# EAGLE board ir_remote_eagle7 (EAGLE 7.7.0)
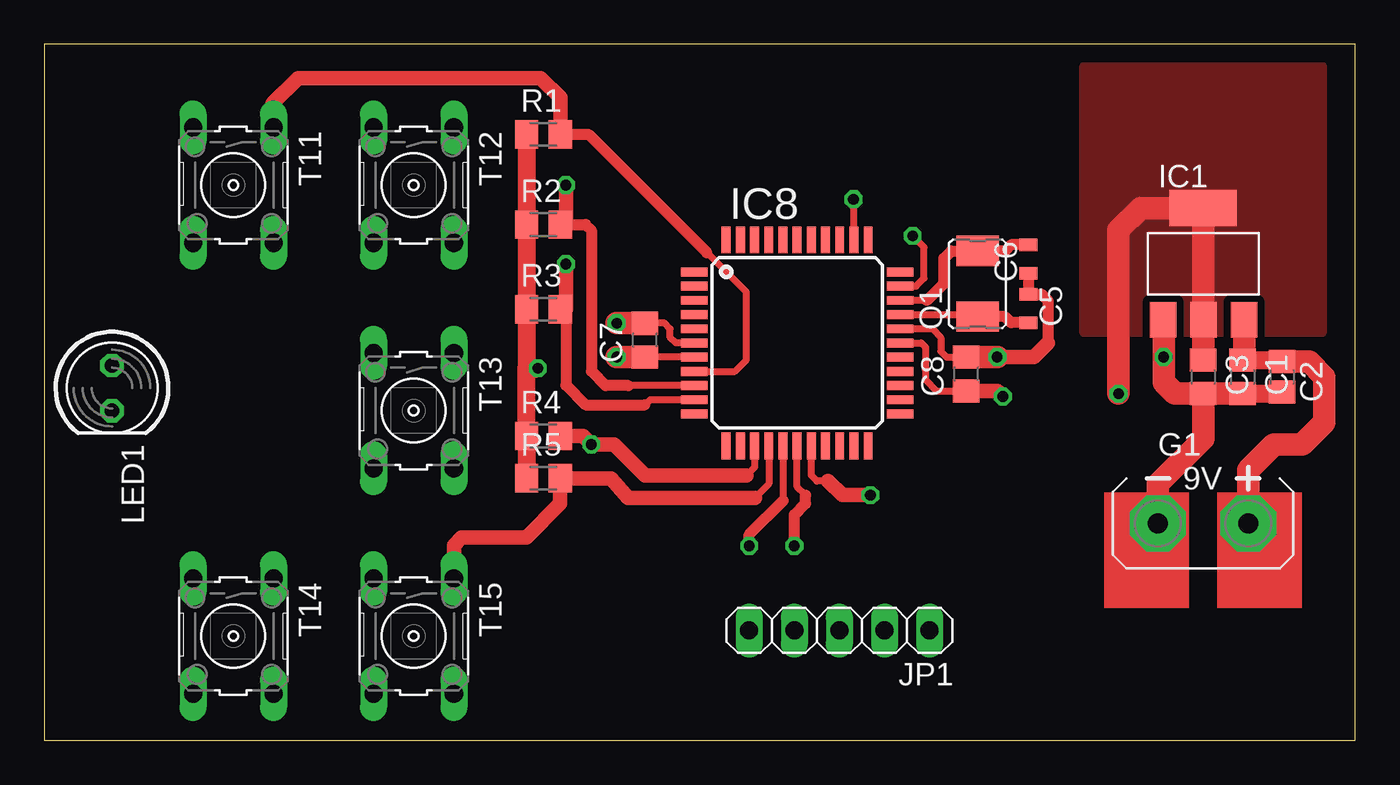
[diagram p0: board, top side]
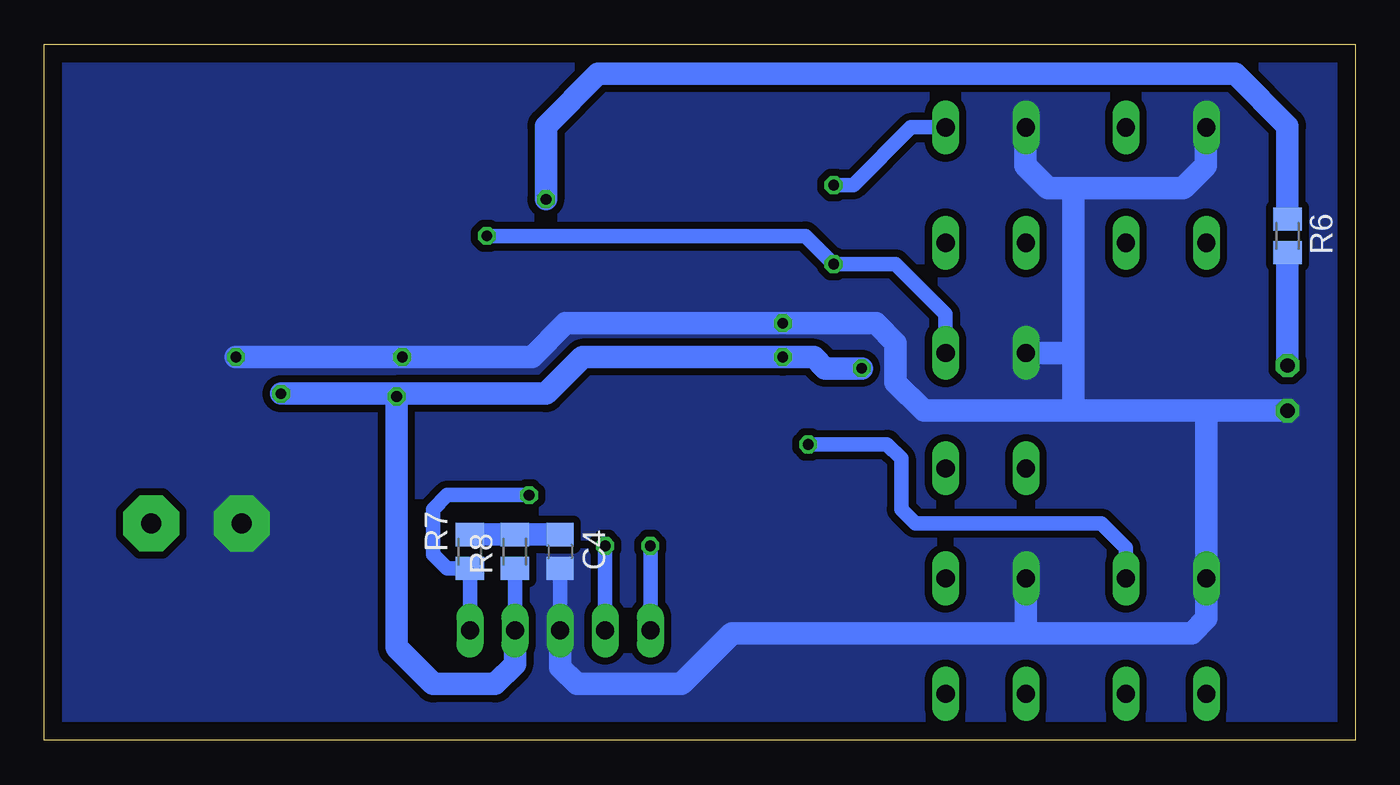
[diagram p1: board, bottom side, seen from below]

Size 73.81 x 39.2 mm. Coordinates in mm from the lower left corner, seen from the top.
Outline: 0,0 73.81,0 73.81,39.2 0,39.2 0,0
Copper layers (1*16): Top 0.035mm / dielectric 1.5mm / Bottom 0.035mm
Design rules "default": minimum track width 6mil, minimum drill 0.35mm, track to track 6mil, track to pad 6mil, pad to pad 6mil, via to via 6mil, smd to smd 6mil, copper to edge 40mil, drill to drill 6mil, minimum pad ring 10mil, minimum via ring 8mil, stop-mask expansion 4mil, vias tented up to drill 0mil, thermal gap 10mil

## Footprints (pad centres in the part's own frame; a part is rotated, then mirrored left to right if it is on the bottom)
C0805 = smd 1.3 x 1.5: 1 -0.95,0; 2 0.95,0
C0805' = smd 1.3 x 1.5: 1 -0.85,0; 2 0.85,0
C0603_WE = smd 0.7 x 1: 1 -0.8,0; 2 0.8,0
AB9V = drill 1.118 pad 3.15 octagon: + 0,2.54; - 0,-2.54
SOT223 = smd 1.499 x 2.007: 1 -2.261,-3.15; 2 0.025,-3.15; 3 2.311,-3.15 | smd 3.81 x 2.007: 4 0,3.15
TQFP44 = smd 1.5 x 0.5: 1 -5.8,4; 2 -5.8,3.2; 3 -5.8,2.4; 4 -5.8,1.6; 5 -5.8,0.8; 6 -5.8,0; 7 -5.8,-0.8; 8 -5.8,-1.6; 9 -5.8,-2.4; 10 -5.8,-3.2; 11 -5.8,-4; 23 5.8,-4; 24 5.8,-3.2; 25 5.8,-2.4; 26 5.8,-1.6; 27 5.8,-0.8; 28 5.8,0; 29 5.8,0.8; 30 5.8,1.6; 31 5.8,2.4; 32 5.8,3.2; 33 5.8,4 | smd 0.5 x 1.5: 12 -4,-5.8; 13 -3.2,-5.8; 14 -2.4,-5.8; 15 -1.6,-5.8; 16 -0.8,-5.8; 17 0,-5.8; 18 0.8,-5.8; 19 1.6,-5.8; 20 2.4,-5.8; 21 3.2,-5.8; 22 4,-5.8; 34 4,5.8; 35 3.2,5.8; 36 2.4,5.8; 37 1.6,5.8; 38 0.8,5.8; 39 0,5.8; 40 -0.8,5.8; 41 -1.6,5.8; 42 -2.4,5.8; 43 -3.2,5.8; 44 -4,5.8
1X05 = drill 1.016 long: 1 -5.08,0; 2 -2.54,0; 3 0,0; 4 2.54,0; 5 5.08,0
LED5MM = drill 0.813 octagon: A -1.27,0; K 1.27,0
QUARZ_HC5032/2 = smd 1.7 x 2.4: 1 -1.85,0; 2 1.85,0
M0805 = smd 1.3 x 1.6: 1 -0.95,0; 2 0.95,0
TASTER3301 = drill 1.016 long: 1 -3.251,2.261; 2 3.251,2.261; 3 -3.251,-2.261; 4 3.251,-2.261

## Placement (x,y rotation side)
C1  10u  [C0805]  67.47,20.48 270 top
C2  100n  [C0805']  69.69,20.48 270 top
C3  10u  [C0805]  65.25,20.48 270 top
C4  100n  [C0805]  44.77,10.64 270 bottom
C5  22p  [C0603_WE]  55.4,24.32 270 top
C6  22p  [C0603_WE]  55.4,27.11 90 top
C7  100n  [C0805]  33.81,22.54 90 top
C8  100n  [C0805]  51.91,20.64 90 top
G1  AB9V  [AB9V]  65.25,12.22 270 top
IC1  AP1117E50G  [SOT223]  65.25,26.83 0 top
IC8  [TQFP44]  42.39,22.38 0 top
JP1  [1X05]  44.77,6.19 180 top
LED1  [LED5MM]  3.81,19.84 270 top
Q1  10MHz  [QUARZ_HC5032/2]  52.55,25.72 90 top
R1  10k  [M0805]  28.1,34.13 0 top
R2  10k  [M0805]  28.1,29.05 0 top
R3  10k  [M0805]  28.1,24.29 0 top
R4  10k  [M0805]  28.1,17.14 0 top
R5  10k  [M0805]  28.1,14.76 0 top
R6  100  [M0805]  3.81,28.42 270 bottom
R7  470  [M0805]  49.85,10.64 90 bottom
R8  10k  [M0805]  47.31,10.64 90 bottom
T11  TASTER3301  [TASTER3301]  10.64,31.27 270 top
T12  TASTER3301  [TASTER3301]  20.8,31.27 270 top
T13  TASTER3301  [TASTER3301]  20.8,18.57 270 top
T14  TASTER3301  [TASTER3301]  10.64,5.87 270 top
T15  TASTER3301  [TASTER3301]  20.8,5.87 270 top

## Library data of the parts
C1 C3-C8 R1-R8 = rcl
C2 = rcl_416
G1 = battery
IC1 = Bernd_110428
IC8 Q1 T11-T15 = Bernd
JP1 = pinhead
LED1 = led

## Nets
+9V: C1.1 C2.1 G1.+ IC1.3
D0_LCD: IC8.27
D1_LCD: IC8.26
GND: C1.2 C2.2 C3.2 C4.2 C5.1 C6.1 C7.2 C8.2 G1.- IC1.1 IC8.6 IC8.29 JP1.3 LED1.K T11.3 T12.3 T13.3 T14.3 T15.3
MCLR: IC8.18 JP1.1 R7.1
N$19: LED1.A R6.2
N$24: C4.1 R7.2 R8.2
N$47: C5.2 IC8.30 Q1.1
N$48: C6.2 IC8.31 Q1.2
RB0: IC8.8 R1.2 T11.1
RB1: IC8.9 R2.2 T12.1
RB2: IC8.10 IC8.32 R3.2 T13.1
RB3: IC8.11
RB4: IC8.14 R4.2 T14.1
RB5: IC8.15 R5.2 T15.1
RB6: IC8.16 JP1.5
RB7: IC8.17 JP1.4
RC1: IC8.35 R6.1
VCC: C3.1 C7.1 C8.1 IC1.2 IC1.4 IC8.7 IC8.28 JP1.2 R1.1 R2.1 R3.1 R4.1 R5.1 R8.1

## Tracks (layer width: path | path; a pad name or v marks a point on that pad's centre or on a via)
+9V
  Top 1.016: C1.1 69.59,21.43 C2.1
  Top 1.27: IC1.3 67.56,21.52 C1.1 | G1.+ 67.79,15.24 69.22,16.67 70.83,16.67 72.07,17.91 72.07,20.48 71.22,21.33 C2.1
GND  (via drill 0.6)
  Top 0.406: IC8.6 35.56,22.38 35.24,22.7 35.24,23.18 34.93,23.49 C7.2 | C8.2 50.8,21.59 50.48,21.91 50.48,22.7 50,23.18 IC8.29
  Top 0.61: C6.1 C5.1 56.16,25.12 56.52,24.77 56.52,22.38
  Top 0.813: 56.52,22.38 55.72,21.59 v53.66,21.59
  Top 1.016: C1.2 69.59,19.53 C2.2
  Top 1.27: G1.- 62.71,14.45 65.25,16.99 C3.2 | IC1.1 63.02,23.64 v63.02,21.59 63.02,20.16 63.66,19.53 C3.2 | C3.2 C1.2 | C8.2 v53.66,21.59 | C7.2 v32.23,23.49 v32.23,23.5
  Bottom 0.813: JP1.3 C4.2
  Bottom 1.27: 15.88,21.81 15.88,18.57 | T13.3 15.89,21.82 15.88,21.81 | 15.88,31.11 9.68,31.11 8.41,32.38 8.41,34.49 T11.3 | 15.88,21.81 15.88,31.11 | 15.88,31.11 17.3,31.11 18.57,32.38 18.57,34.49 T12.3 | JP1.3 44.77,4.13 43.81,3.17 37.94,3.17 35.08,6.03 18.61,6.03 | 18.61,6.03 9.21,6.03 8.38,6.86 T14.3 8.38,18.54 8.41,18.57 | T15.3 18.54,6.1 18.61,6.03 | 15.88,18.57 24.29,18.57 25.88,20.16 25.88,22.38 26.99,23.5 v32.23,23.5 44.45,23.5 46.35,21.59 v53.66,21.59 v63.02,21.59 | LED1.K 8.41,18.57 | 8.41,18.57 15.88,18.57
  pour Bottom (isolate 0.406, no thermals): 0,39.21 0,0 73.82,0 73.82,39.21
MCLR  (via drill 0.6)
  Top 0.406: 44.13,14.61 43.5,14.61 43.18,14.92 IC8.18
  Top 0.813: v46.51,13.81 44.93,13.81 44.13,14.61
  Bottom 0.813: JP1.1 R7.1 51.12,9.69 51.91,10.48 51.91,13.02 51.12,13.81 v46.51,13.81
N$19
  Bottom 1.27: LED1.A R6.2
N$24
  Bottom 1.27: C4.1 R8.2 R7.2
N$47
  Top 0.406: 52.33,23.65 Q1.1 52.43,23.98 IC8.30
  Top 0.61: C5.2 54.43,23.52 54.08,23.87 Q1.1
N$48
  Top 0.406: 49.69,24.78 IC8.31
  Top 0.61: 49.69,24.78 50.64,25.74 50.64,27.15 51.06,27.57 Q1.2 54.08,27.57 54.43,27.91 C6.2
RB0
  Top 0.406: IC8.8 38.88,20.78 39.53,21.43 39.53,25.24 37.31,27.46
  Top 0.61: R1.2 30.64,34.13 37.31,27.46
  Top 0.813: T11.1 12.86,34.56 12.86,35.88 14.29,37.31 27.94,37.31 29.05,36.2 R1.2
RB1  (via drill 0.6)
  Top 0.406: 29.37,29.37 R2.2 | 36.57,20 IC8.9 32.88,19.98 32.86,20
  Top 0.61: R2.2 30.48,29.05 30.8,28.73 30.8,20.8 31.61,19.98 32.88,19.98
  Top 0.813: v29.37,31.27 29.37,29.37
  Bottom 0.813: T12.1 25.01,34.52 28.26,31.27 v29.37,31.27
RB2  (via drill 0.6)
  Top 0.406: 29.37,24.61 R3.2 | IC8.10 34.11,19.18 33.81,18.89 | v48.9,28.42 49.53,27.78 49.53,26.04 49.08,25.58 IC8.32
  Top 0.61: 29.37,24.29 29.37,20 30.48,18.89 33.81,18.89
  Top 0.813: v29.37,26.83 29.37,24.61 29.37,24.29
  Bottom 0.813: T13.1 23.06,24.01 25.88,26.83 v29.37,26.83 30.96,28.42 v48.9,28.42
RB4  (via drill 0.6)
  Top 0.406: 39.53,14.92 40.01,15.4 40.01,16.57 IC8.14
  Top 0.813: 39.53,14.92 33.81,14.92 32.07,16.67 v30.8,16.67 30.32,17.14 R4.2
  Bottom 0.813: v30.8,16.67 26.35,16.67 25.56,15.88 25.56,13.02 24.77,12.22 14.29,12.22 12.9,10.83 T14.1
RB5
  Top 0.406: IC8.15 40.8,14.45 40.01,13.65
  Top 0.813: 40.01,13.65 32.86,13.65 31.91,14.76 R5.2 29.05,13.33 27.15,11.43 23.5,11.43 23.06,10.99 T15.1
RB6  (via drill 0.6)
  Top 0.406: 41.59,13.49 41.59,13.5 IC8.16
  Top 0.61: v39.69,10.95 39.69,11.59 41.59,13.49
  Bottom 0.813: v39.69,10.95 JP1.5
RB7  (via drill 0.6)
  Top 0.406: 42.86,13.81 42.39,14.29 IC8.17
  Top 0.61: v42.23,10.95 42.23,12.7 42.86,13.34 42.86,13.81
  Bottom 0.813: v42.23,10.95 JP1.4
RC1  (via drill 0.6)
  Top 0.406: IC8.35 45.59,30.45 v45.56,30.48
  Bottom 1.27: R6.1 3.81,34.61 6.75,37.55 42.62,37.55 45.56,34.61 v45.56,30.48
VCC  (via drill 0.6)
  Top 0.406: IC8.7 34.14,21.58 C7.1 | IC8.28 49.38,22.38 49.61,22.15 49.61,21.2 49.61,20.88 49.61,20.32 50.24,19.69 C8.1
  Top 0.813: C8.1 53.66,19.69 v53.98,19.37
  Top 1.016: R1.1 R2.1 R3.1 27.15,20.95 | 27.15,20.95 R4.1 R5.1 | 27.15,20.95 v27.78,20.95
  Top 1.27: C3.1 65.27,21.45 IC1.2 65.27,29.95 IC1.4 61.73,29.98 60.48,28.73 v60.48,19.53 | C7.1 v32.23,21.59
  Bottom 0.813: R8.1 JP1.2
  Bottom 1.27: JP1.2 47.31,4.29 48.42,3.17 51.91,3.17 53.98,5.24 v53.98,19.37 53.98,19.53 | v60.48,19.53 53.98,19.53 | v27.78,20.95 29.84,20.95 30.48,21.59 v32.23,21.59 43.5,21.59 45.56,19.53 53.98,19.53
  pour Top (isolate 0.406, no thermals): 58.58,37.94 71.91,37.94 71.91,23.02 58.58,23.02
(copper drawn outside any net)
  shapes: Top area x2